# Allegro board CM_PCB_V2_03APR2019.brd
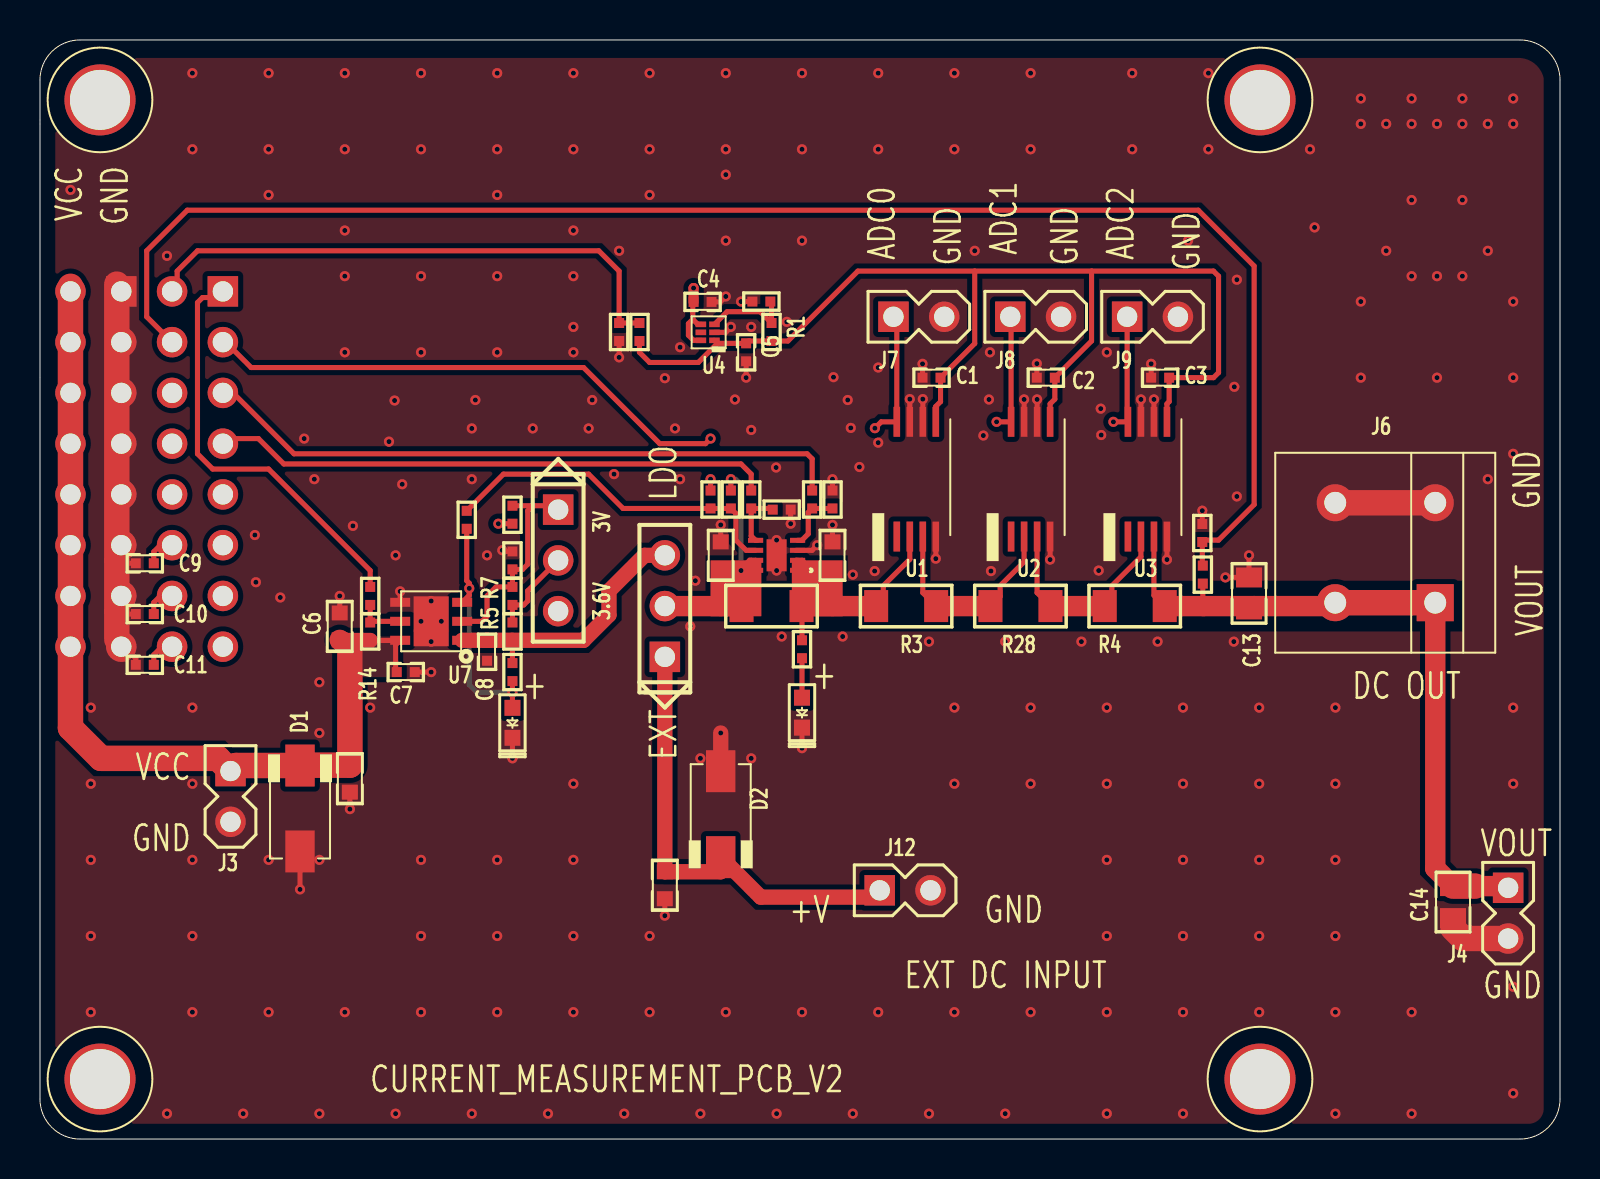
[diagram p0: board, top side]
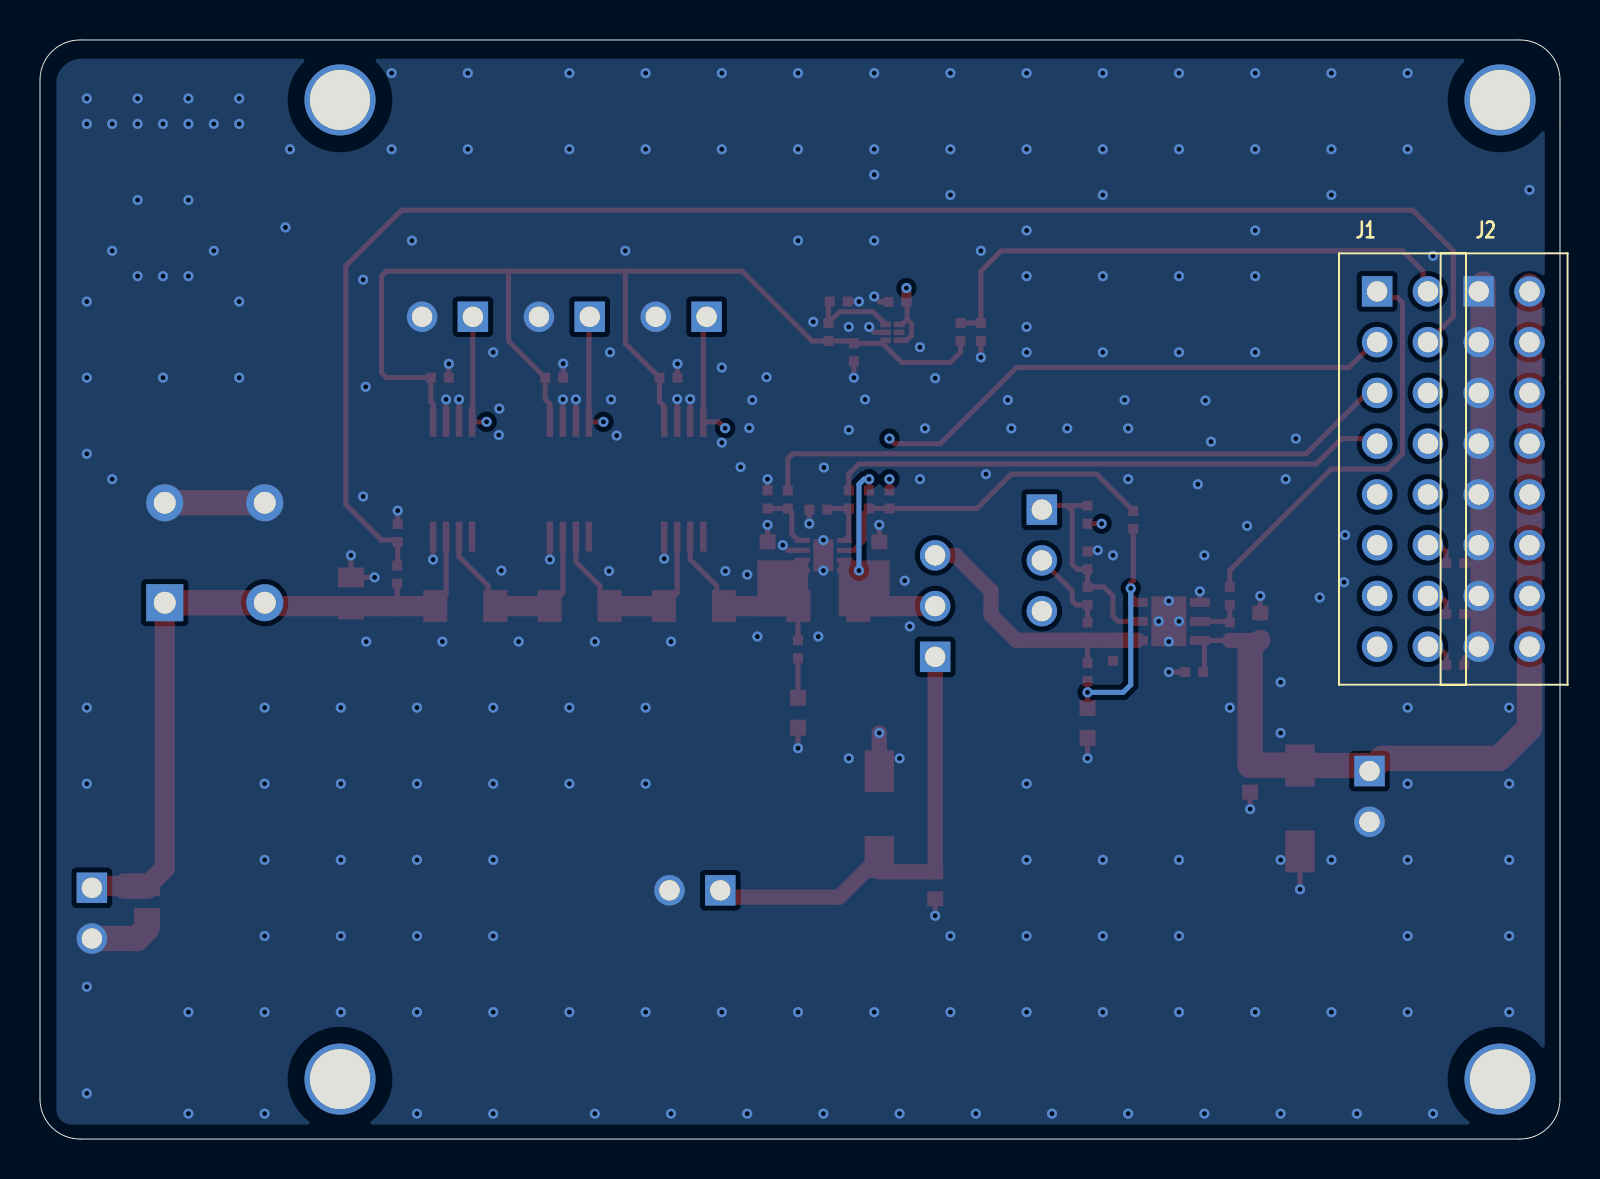
[diagram p1: board, bottom side, seen from below]

Outline 76 x 55 mm; copper layers: TOP, L2_GND, L3_PWR, BOTTOM. Coordinates in mm from the lower left corner of the outline.
Outline path: 0,53 arc(0.59,54.41) 2,55 74,55 arc(75.41,54.41) 76,53 76,2 arc(75.41,0.59) 74,0 2,0 arc(0.59,0.59) 0,2 0,53

## Design rules (mm)
constraint set DEFAULT: min track width 0.127

## Placement (name value [footprint] x y rotation side)
C1  1uF  [C0402]  44.58 38.1 90 top
C2  1uF  [C0402]  50.29 38.1 90 top
C3  1uF  [C0402]  56.01 38.1 90 top
C4  1uF  [C0402]  33.13 41.89 270 top
C5  4.7uF  [C0402]  35.31 39.37 180 top
C6  10uF, 10V  [C0603]  14.99 25.65 180 top
C7  1uF  [C0402]  18.29 23.37 270 top
C8  4.7uF  [C0402]  22.35 24.38 180 top
C9  NL  [C0402]  5.24 28.81 90 top
C10  NL  [C0402]  5.24 26.27 90 top
C11  NL  [C0402]  5.24 23.73 90 top
C12  10uF, 10V  [C0603]  15.49 18.03 0 top
C13  NL  [C0805]  60.45 27.3 180 top
C14  NL  [C0805]  70.65 11.86 0 top
C15  10uF, 10V  [C0603]  31.24 12.7 0 top
C16  10uF, 10V  [C0603]  34.04 29.21 180 top
C17  10uF, 10V  [C0603]  39.62 29.21 180 top
D1  1SMA4746  [SMA4745]  13 16.54 90 top
D2  1SMA4746  [SMA4745]  34.04 16.26 270 top
D12  GREEN 0603  [LED_160804_1]  38.1 21.34 0 top
D17  GREEN 0603  [LED_160804_1]  23.62 20.83 0 top
J1  CON2X8  [HDR2X8]  7.87 33.53 180 bottom
J2  CON2X8  [HDR2X8]  2.79 33.53 180 bottom
J3  HDR1X2  [HDR1X2_100MIL]  9.53 18.41 0 top
J4  HDR1X2  [HDR1X2_100MIL]  73.41 12.57 0 top
J6  TERM_BLK_2_45DEG_PUSH  [2TERMINAL_1862411]  69.76 26.84 180 top
J7  HDR1X2  [HDR1X2_100MIL]  42.67 41.15 90 top
J8  HDR1X2  [HDR1X2_100MIL]  48.51 41.15 90 top
J9  HDR1X2  [HDR1X2_100MIL]  54.36 41.15 90 top
J10  HDR1X3  [HDR1X3_100MIL]  31.24 24.13 180 top
J11  HDR1X3  [HDR1X3_100MIL]  25.91 31.5 0 top
J12  HDR1X2  [HDR1X2_100MIL]  41.99 12.45 90 top
MH1  -  [NPTH3MM]  3 52 0 top
MH2  -  [NPTH3MM]  3 3 0 top
MH3  -  [NPTH3MM]  61 3 0 top
MH4  -  [NPTH3MM]  61 52 0 top
NOREF  -  []  70 0 90 top
NOREF#2  -  []  92.53 -49.75 0 top
NOREF#3  -  []  0 42.12 0 top
R1  464K  [R0402]  36.58 40.39 0 top
R2  100K  [R0402]  36.07 41.91 270 top
R3  1  [R1206]  43.31 26.67 90 top
R4  0.01  [R1206]  54.74 26.67 90 top
R5  280K  [R0402]  23.62 25.4 0 top
R6  100K  [R0402]  23.62 28.96 0 top
R7  121K  [R0402]  23.62 27.18 0 top
R9  301K  [R0402]  29.97 40.39 0 top
R10  100K  [R0402]  58.12 30.33 0 top
R11  301K  [R0402]  58.14 28.24 0 top
R12  100K  [R0402]  28.96 40.39 180 top
R13  4.7K  [R0402]  38.1 24.51 180 top
R14  4.7K  [R0402]  16.51 25.4 180 top
R15  0  [R0402]  16.51 27.18 180 top
R16  NL  [R1206]  36.58 26.67 90 top
R17  4.7K  [R0402]  33.53 32 180 top
R18  100K  [R0402]  34.54 32 0 top
R19  0  [R0402]  35.56 32 180 top
R20  0  [R0402]  38.61 32 0 top
R21  100K  [R0402]  37.08 31.5 90 top
R22  100K  [R0402]  39.62 32 180 top
R27  4.7K  [R0402]  23.62 23.37 180 top
R28  0.1  [R1206]  49.02 26.67 90 top
R29  0  [R0402]  21.34 30.99 0 top
R30  169K  [R0402]  23.62 31.24 0 top
U1  INA240A4PWR  [TSSOP8]  43.81 33.02 90 top
U2  INA240A4PWR  [TSSOP8]  49.53 33.02 90 top
U3  INA240A4PWR  [TSSOP8]  55.37 33.02 90 top
U4  LDK130PU-R  [DFN6_1P2X1P5]  33.38 40.37 180 top
U6  ADP198ACPZ-R7  [CP_8_10]  36.83 29.21 180 top
U7  LDFMPUR  [6-DFN-3X3]  19.56 25.91 180 top

## Library data of the parts
C1-C17 = CAP NP_0
D1 D2 = DIODE ZENER
D12 D17 = LED_0603
J1 J2 = CON2X8
J3 J4 J7-J9 J12 = HDR1X2
J6 = TERM_BLK_2_45DEG_PUSH
J10 J11 = HDR1X3
MH1-MH4 = 4MM_NPTH_0
R1-R7 R9-R22 R27-R30 = RES-H
U1-U3 = INA240AxPW
U4 = LDK130_ADJ
U6 = ADP198ACPZ-R7_0: User Part Number: PN; Tolerance: TOL
U7 = LDFMPUR

## Footprints (pads in the part's own frame, mm; a bottom-side part is the same pattern mirrored in y, then rotated)
2TERMINAL_1862411
  rect 1.854x1.854 hole 1.092: 1(0,0)
  round 1.854 hole 1.092: 2(0,-5) 3(5,-5) 4(5,0)
6-DFN-3X3
  rect 1x0.45 smd: 1(-1.55,0.95) 2(-1.55,0) 3(-1.55,-0.95) 4(1.55,-0.95) 5(1.55,0) 6(1.55,0.95)
  rect 1.75x2.5 smd: 7(0,0)
C0402
  rect 0.5x0.5 smd: 1(0,0.45) 2(0,-0.45)
C0603
  rect 0.8x0.75 smd: 1(0,0.675) 2(0,-0.675)
C0805
  rect 1.3x1 smd: 1(0,0.8) 2(0,-0.8)
CP_8_10
  rect 0.755x0.25 smd: 1(-1.05,0.75) 2(-1.05,0.25) 3(-1.05,-0.25) 4(-1.05,-0.75) 5(1.05,-0.75) 6(1.05,-0.25) 7(1.05,0.25) 8(1.05,0.75)
  rect 1x1.6 smd: 9(0,0)
DFN6_1P2X1P5
  rect 0.53x0.28 smd: 1(-0.34,0.4) 2(-0.34,0) 3(-0.34,-0.4) 4(0.34,-0.4) 5(0.34,0) 6(0.34,0.4)
HDR1X2_100MIL
  rect 1.524x1.524 hole 1.016: 1(0,0)
  round 1.524 hole 1.016: 2(0,-2.54)
HDR1X3_100MIL
  rect 1.524x1.524 hole 1.016: 1(0,0)
  round 1.524 hole 1.016: 2(0,-2.54) 3(0,-5.08)
HDR2X8
  rect 1.524x1.524 hole 1.016: 1(-1.27,8.89)
  round 1.524 hole 1.016: 2(1.27,8.89) 3(-1.27,6.35) 4(1.27,6.35) 5(-1.27,3.81) 6(1.27,3.81) 7(-1.27,1.27) 8(1.27,1.27) 9(-1.27,-1.27) 10(1.27,-1.27) 11(-1.27,-3.81) 12(1.27,-3.81) 13(-1.27,-6.35) 14(1.27,-6.35) 15(-1.27,-8.89) 16(1.27,-8.89)
LED_160804_1
  rect 0.8x0.8 smd: 1(0,0.75) 2(0,-0.75)
NPTH3MM
  round 3.556 hole 3: 1(0,0)
R0402
  rect 0.5x0.5 smd: 1(0,0.45) 2(0,-0.45)
R1206
  rect 1.6x1.2 smd: 1(0,1.5) 2(0,-1.5)
SMA4745
  rect 2.1x1.47 smd: 1(-2.15,0) 2(2.15,0)
TSSOP8
  rect 1.5x0.33 smd: 1(-2.87,0.975) 2(-2.87,0.325) 3(-2.87,-0.325) 4(-2.87,-0.975) 5(2.87,-0.975) 6(2.87,-0.325) 7(2.87,0.325) 8(2.87,0.975)

## Nets
4V5: C1.2 C2.2 C3.2 C5.2 R1.2 R9.2 U1.5(VS) U2.5(VS) U3.5(VS) U4.1(OUT)
4V5_SCALED: J1.2 R9.1 R12.2
GND: C1.1 C2.1 C3.1 C4.1 C5.1 C6.2 C7.1 C8.1 C9.1 C10.1 C11.1 C12.2 C13.2 C14.2 C15.2 C16.2 C17.2 D1.1 D2.1 D12.2(CATHODE) D17.2(CATHODE) J2.1 J2.3 J2.5 J2.7 J2.9 J2.11 J2.13 J2.15 J3.2 J4.2 J6.2 J6.3(2B) J7.2 J8.2 J9.2 J12.2 R2.2 R6.1 R10.1 R12.1 R21.2 R22.2 U1.4 U1.6 U1.7 U2.4 U2.6 U2.7 U3.4 U3.6 U3.7 U4.2 U6.3 U6.9 U7.4 U7.7
VIN: C4.2 C6.1 C7.2 C12.1 D1.2(CATHODE) J2.2 J2.4 J2.6 J2.8 J2.10 J2.12 J2.14 J2.16 J3.1 R14.1 U4.4 U4.6 U7.6
11: J1.11
ADC_IN0: C11.2 J1.16 J7.1 U1.8
ADC_IN1: C10.2 J1.14 J8.1 U2.8
ADC_IN2: C9.2 J1.12 J9.1 U3.8
LDO_PGOOD: D17.1 R27.1 R29.2 U7.3
P22_CNRL: J1.7 R19.2
P23_CNRL: J1.5 R20.1
P24_CNRL: J1.3 R17.2
P25_CNRL: J1.1 R15.2
SW_EN: R17.1 R18.2 R29.1 U6.6
V_EXT: C15.1 D2.2(CATHODE) J10.1 J12.1
VADJ: J11.1 R6.2 R7.1 R30.1 U7.2
VLDO: C8.2 J10.3 R5.2 R27.2 U7.1(VOUT)
VOUT: C13.1 C14.1 J4.1 J6.1 J6.4 R4.2 R11.2 U3.3
VOUT_SCALED: J1.4 R10.2 R11.1
VOUTA: C17.1 R3.1 R13.2 R16.2 U1.2 U6.1 U6.2(VOUT_1)
VOUTB: R3.2 R28.1 U1.3 U2.2
VOUTC: R4.1 R28.2 U2.3 U3.2
VSW: C16.1 J10.2 R16.1 R18.1 U6.7 U6.8
N17460686: R1.1 R2.1 U4.3
N17472971: MH1.1(MH)
N17473001: MH3.1(MH)
N17473004: MH2.1(MH)
N17473007: MH4.1(MH)
N17481014: J11.2 R5.1 R7.2
N17481423: D12.1 R13.1
N17482224: R14.2 R15.1 U7.5
N17485003: R19.1 R21.1 U6.5
N17485029: R20.2 R22.1 U6.4
N17501450: J11.3 R30.2

Pads without a net: J1 6 8 9 10 13 15; U1 1; U2 1; U3 1; U4 5

## Via types
v1: diameter 0.508, hole 0.254, TOP to BOTTOM, 265 vias

## Routing (per net, layer and track width the routed paths; a pad name or vN(x,y) marks a point on that pad's centre or on a via; arc(x,y) is an arc through that point)
4V5: length 58.4
  TOP w0.254: 33.87,39.82 C5.2 35.42,39.94 R1.2 37.4,39.94 40.89,43.43 46.74,43.43 ; 33.87,39.82 U4.1 ; 33.87,39.82 32.91,38.86 30.48,38.86 29.97,39.37 R9.2 ; 52.58,43.43 46.74,43.43 ; 52.58,43.43 58.67,43.43 58.93,43.18 58.93,38.35 58.67,38.1 C3.2 56.46,36.9 56.35,36.79 U3.5 ; 52.58,43.43 52.58,39.94 C2.2 50.74,37.03 50.51,36.79 U2.5 ; 46.74,43.43 46.74,39.81 C1.2 45.03,36.9 44.79,36.66 U1.5
4V5_SCALED: length 27.7
  TOP w0.254: J1.2 6.6,42.67 6.86,42.93 6.86,43.43 7.87,44.45 27.94,44.45 28.96,43.43 R12.2 R9.1
GND: length 68.7
  TOP w0.254: D12.2 v1(38.1,19.56) ; D17.2 v1(23.62,19.05) ; v1(38.86,29.72) 38.6,29.46 37.81,29.46 ; R2.2 v1(35.05,41.91) ; v1(23.11,29.46) 23.17,29.41 R6.1 ; C9.1 3.99,28.81 3.84,28.96 ; v1(59.27,28.11) C13.2 v1(60.45,29.21) ; C15.2 v1(31.24,11.18) ; C3.1 v1(55.56,38.79) ; U1.4 v1(44.79,29.04) ; C10.1 3.99,26.27 3.84,26.42 ; C14.2 70.65,9.99 ; C7.1 v1(19.56,23.37) ; v1(34.29,42.16) 34.02,41.89 C4.1 ; C1.1 v1(44.13,38.79) ; U2.4 v1(50.51,29) ; U7.7 v1(20.07,25.91) ; U7.7 v1(19.56,24.89) ; U7.7 v1(19.05,25.91) ; U7.7 v1(19.56,26.92) ; v1(36.83,29.97) U6.9 v1(36.83,28.45) ; U3.7 v1(55.05,37.01) ; U1.7 v1(43.49,37.03) ; C16.2 v1(34.04,30.73) ; C12.2 v1(15.49,16.51) ; U2.7 v1(49.2,37.01) ; 3.84,25 4.79,24.06 C11.1 ; R12.1 v1(28.96,39.12) ; U4.2 34.29,40.37 34.54,40.62 v1(34.54,40.64) ; U1.6 v1(44.14,37.03) ; C5.1 v1(35.31,38.1) ; U7.4 v1(18.01,27.41) ; U3.6 v1(55.7,37.01) ; C17.2 v1(39.62,30.73) ; U2.6 v1(49.86,37.01) ; C6.2 v1(14.99,27.18) ; R22.2 v1(39.62,33.02) ; D1.1 v1(13,12.49) ; R10.1 v1(58.12,31.45) ; C2.1 v1(49.84,38.8) ; R21.2 v1(37.53,30.79) ; U3.4 v1(56.35,29)
  TOP w0.762: D2.1 v1(34.04,20.32)
  TOP w1.27: 3.84,42.78 3.84,25 ; 73.41,10.03 71.16,10.03 70.65,10.54 ; J6.3 J6.2
  vias: v1(1.52,47.5) v1(2.54,21.59) v1(2.54,17.78) v1(2.54,13.97) v1(2.54,10.16) v1(2.54,6.35) v1(6.35,44.2) v1(6.35,1.27) v1(7.62,53.34) v1(7.62,49.53) v1(7.62,21.59) v1(7.62,17.78) v1(7.62,13.97) v1(7.62,10.16) v1(7.62,6.35) v1(10.16,1.27) v1(10.74,30.23) v1(10.79,27.86) v1(11.43,53.34) v1(11.43,49.53) v1(11.43,47.24) v1(11.43,13.97) v1(11.43,6.35) v1(12.01,27.1) v1(13.21,35.05) v1(13.72,33.02) v1(13.97,22.86) v1(13.97,20.32) v1(13.97,13.97) v1(13.97,1.27) v1(15.24,53.34) v1(15.24,49.53) v1(15.24,45.47) v1(15.24,43.18) v1(15.24,39.37) v1(15.24,6.35) v1(15.65,30.68) v1(16.51,21.59) v1(17.45,34.9) v1(17.73,36.96) v1(17.78,29.21) v1(17.78,1.27) v1(18.11,32.77) v1(19.05,53.34) v1(19.05,49.53) v1(19.05,43.18) v1(19.05,39.37) v1(19.05,13.97) v1(19.05,10.16) v1(19.05,6.35) v1(21.59,35.56) v1(21.59,33.02) v1(21.59,1.27) v1(21.77,36.98) v1(22.35,29.21) v1(22.86,53.34) v1(22.86,49.53) v1(22.86,47.24) v1(22.86,43.18) v1(22.86,39.37) v1(22.86,13.97) v1(22.86,10.16) v1(22.86,6.35) v1(24.64,35.56) v1(25.4,1.27) v1(26.67,53.34) v1(26.67,49.53) v1(26.67,45.47) v1(26.67,43.18) v1(26.67,40.64) v1(26.67,39.37) v1(26.67,17.78) v1(26.67,13.97) v1(26.67,10.16) v1(26.67,6.35) v1(27.43,35.56) v1(27.61,36.98) v1(28.7,33.27) v1(28.96,44.45) v1(29.21,1.27) v1(30.48,53.34) v1(30.48,49.53) v1(30.48,47.24) v1(30.48,10.16) v1(30.48,6.35) v1(31.24,38.07) v1(31.75,35.56) v1(32,39.62) v1(32,33.02) v1(32.51,25.65) v1(32.77,27.94) v1(33.02,19.05) v1(33.02,1.27) v1(34.29,53.34) v1(34.29,49.53) v1(34.29,48.26) v1(34.29,44.96) v1(34.29,6.35) v1(34.75,37.01) v1(35.56,40.64) v1(35.56,35.48) v1(35.56,19.05) v1(36.8,33.6) v1(36.83,1.27) v1(37.08,25.15) v1(37.34,40.89) v1(38.1,53.34) v1(38.1,49.53) v1(38.1,44.96) v1(38.1,6.35) v1(39.67,38.13) v1(40.13,25.15) v1(40.39,36.98) v1(40.54,35.59) v1(40.64,28.24) v1(40.64,1.27) v1(40.97,33.63) v1(41.73,28.42) v1(41.91,53.34) v1(41.91,49.53) v1(41.91,38.61) v1(41.91,34.85) v1(41.91,6.35) v1(44.45,24.89) v1(44.45,1.27) v1(45.72,53.34) v1(45.72,49.53) v1(45.72,21.59) v1(45.72,17.78) v1(45.72,6.35) v1(46.74,44.45) v1(47.17,35.2) v1(47.45,37.01) v1(47.5,39.37) v1(47.55,28.42) v1(48.26,24.89) v1(48.26,1.27) v1(49.53,53.34) v1(49.53,49.53) v1(49.53,21.59) v1(49.53,17.78) v1(49.53,6.35) v1(52.07,24.89) v1(52.93,28.45) v1(53.04,36.55) v1(53.06,35.23) v1(53.34,39.37) v1(53.34,21.59) v1(53.34,17.78) v1(53.34,13.97) v1(53.34,10.16) v1(53.34,6.35) v1(53.34,1.27) v1(54.61,53.34) v1(54.61,49.53) v1(55.88,24.89) v1(57.15,21.59) v1(57.15,17.78) v1(57.15,13.97) v1(57.15,10.16) v1(57.15,6.35) v1(57.15,1.27) v1(57.4,44.96) v1(58.42,53.34) v1(58.42,49.53) v1(59.72,37.64) v1(59.69,24.89) v1(59.84,43) v1(59.84,32.16) v1(60.96,21.59) v1(60.96,17.78) v1(60.96,13.97) v1(60.96,10.16) v1(60.96,6.35) v1(63.5,49.53) v1(63.73,45.62) v1(64.77,21.59) v1(64.77,17.78) v1(64.77,13.97) v1(64.77,10.16) v1(64.77,6.35) v1(64.77,1.27) v1(66.04,52.07) v1(66.04,50.8) v1(66.04,41.91) v1(66.04,38.1) v1(67.31,50.8) v1(67.31,44.45) v1(68.58,52.07) v1(68.58,50.8) v1(68.58,46.99) v1(68.58,43.18) v1(68.58,6.35) v1(68.58,1.27) v1(69.85,50.8) v1(69.85,43.18) v1(69.85,38.1) v1(71.12,52.07) v1(71.12,50.8) v1(71.12,46.99) v1(71.12,43.18) v1(72.39,50.8) v1(72.39,44.45) v1(72.39,33.02) v1(73.66,52.07) v1(73.66,50.8) v1(73.66,41.91) v1(73.66,38.1) v1(73.66,34.29) v1(73.66,21.59) v1(73.66,17.78) v1(73.66,7.62) v1(73.66,2.29)
VIN: length 89.1
  TOP w0.254: R14.1 18,24.95 ; 18,24.95 U7.6 ; 18,24.95 17.78,24.73 17.78,23.43 C7.2 ; 32.64,41.02 32.89,40.77 U4.4 ; 32.64,41.02 32.42,40.8 32.42,40.22 32.67,39.97 U4.6 ; 32.64,41.02 32.64,41.85 C4.2
  TOP w0.508: C4.2 v1(32.68,42.58)
  TOP w0.762: 15.02,24.95 R14.1
  TOP w1.016: C6.1 15.49,24.47 15.49,24.38
  TOP w1.27: 15.49,24.38 C12.1 13.02,18.71 D1.2 9.8,18.69 J3.1 8.89,19.05 3.05,19.05 1.52,20.57 J2.16 J2.14 J2.12 J2.10 J2.8 J2.6 J2.4 J2.2 1.52,42.67
  L3_PWR w0.508: v1(32.68,42.58) 26.95,48.31 5.41,48.31 1.52,44.42 J2.2
ADC_IN0: length 48.9
  TOP w0.254: J1.16 6.1,24.64 5.69,24.23 C11.2 ; v1(41.74,35.57) 42.06,35.89 U1.8 42.84,40.98 J7.1
  L3_PWR w0.254: v1(41.74,35.57) 40.94,34.77 35.23,34.77 34.26,35.74 32.99,35.74 32.03,34.77 18.8,34.77 9.98,25.96 7.34,25.96 6.6,25.22 J1.16
ADC_IN1: length 53.2
  TOP w0.254: C10.2 5.69,26.85 6.02,27.18 J1.14 ; J8.1 48.55,41.11 U2.8 v1(47.83,35.89)
  L3_PWR w0.254: J1.14 6.6,27.76 7.29,28.45 10.13,28.45 18.03,36.35 42.52,36.35 42.98,35.89 v1(47.83,35.89)
ADC_IN2: length 59
  TOP w0.254: v1(53.67,35.89) U3.8 54.36,35.93 J9.1 ; C9.2 5.69,29.39 6.02,29.72 J1.12
  L3_PWR w0.254: v1(53.67,35.89) 52.63,35.89 52.1,36.42 45.59,36.42 44.45,37.57 17.09,37.57 10.52,30.99 7.29,30.99 6.58,30.28 6.6,30.25 J1.12
LDO_PGOOD: length 12.4
  TOP w0.254: D17.1 v1(23.62,22.35) R27.1 ; U7.3 21.46,27.21 v1(21.46,27.56) 21.46,27.81 21.34,27.94 R29.2
  BOTTOM w0.254: v1(23.62,22.35) 21.84,22.35 21.46,22.73 v1(21.46,27.56)
P22_CNRL: length 28.4
  TOP w0.254: J1.7 9.14,34.94 9.03,35.05 10.92,35.05 12.19,33.78 35.05,33.78 35.56,33.27 R19.2
P23_CNRL: length 32.9
  TOP w0.254: J1.5 9.14,37.48 9.03,37.59 9.4,37.59 12.7,34.29 38.35,34.29 38.61,34.04 R20.1
P24_CNRL: length 29.6
  TOP w0.254: R17.2 v1(33.53,33.02) ; v1(33.53,35.05) 33.27,34.8 30.99,34.8 27.18,38.61 10.56,38.61 9.14,40.02 ; 9.14,40.02 J1.3 ; 9.14,40.02 9.03,40.13
  L2_GND w0.254: v1(33.53,33.02) v1(33.53,35.05)
P25_CNRL: length 21.3
  TOP w0.254: R15.2 16.51,28.45 11.43,33.53 8.64,33.53 7.87,34.29 7.87,41.86 8.13,42.11 8.58,42.11 9.14,42.67 J1.1
SW_EN: length 17.6
  TOP w0.254: U6.6 35.31,29.46 34.8,29.97 34.8,31.3 R18.2 R17.1 29.15,31.55 27.43,33.27 23.17,33.27 R29.1
V_EXT: length 23.2
  TOP w0.762: J10.1 C15.1 34.04,13.37 D2.2 36.04,12.1 41.65,12.1 J12.1
VADJ: length 11.1
  TOP w0.254: U7.2 22.1,25.91 22.35,26.16 22.35,27.18 22.8,27.63 R7.1 R6.2 ; R6.2 24.13,28.51 24.38,28.76 24.38,31.44 24.64,31.69 ; R6.2 23.68,28.45 ; 24.64,31.69 25.71,31.69 J11.1 ; 24.64,31.69 R30.1
VLDO: length 13.9
  TOP w0.254: C8.2 22.35,24.96 ; 23.62,24.96 R5.2 R27.2
  TOP w0.762: J10.3 30.23,29.21 28.45,27.43 28.45,26.23 27.18,24.96 U7.1
VOUT: length 36.3
  TOP w0.254: R11.2 58.14,26.7 58.17,26.67 ; 56.39,26.52 R4.2 55.7,27.21 U3.3 ; 60.71,26.67 60.54,26.5 C13.1
  TOP w1.016: C14.1 69.76,13.55 J6.1 ; 71.75,12.66 73.32,12.66 J4.1 ; R4.2 64.59,26.67 J6.4
  TOP w1.27: J6.1 J6.4 ; C14.1 71.75,12.66
VOUT_SCALED: length 79.1
  TOP w0.254: J1.4 6.6,40.13 6.49,40.13 6.38,40.24 6.24,40.24 5.33,41.15 5.33,44.45 7.37,46.48 57.91,46.48 60.71,43.69 60.71,31.75 58.93,29.97 58.21,29.97 R10.2 58.12,28.72 R11.1
VOUTA: length 14.4
  TOP w0.254: R13.2 38.1,26.65 R16.2 ; U1.2 43.49,29.01 42.16,27.69 42.16,27.03 R3.1 ; 37.81,28.46 U6.1 38.61,28.46 ; 38.61,28.46 38.11,28.96 37.81,28.96 U6.2 ; 38.61,28.46 39.55,28.46 C17.1 39.62,26.67
  TOP w1.016: R16.2 R3.1
VOUTB: length 10.6
  TOP w0.254: R28.1 48.01,27.15 48.01,27.69 49.2,28.88 U2.2 ; R3.2 44.14,27.34 U1.3
  TOP w1.016: R3.2 R28.1
VOUTC: length 10.7
  TOP w0.254: U3.2 55.05,29.14 53.59,27.69 53.59,27.03 R4.1 ; R28.2 49.85,27.34 U2.3
  TOP w1.016: R28.2 R4.1
VSW: length 14.6
  TOP w0.254: U6.8 U6.7 35.48,28.96 34.98,28.46 ; U6.8 35.06,28.46 ; U6.8 35.85,28.46 ; R18.1 v1(34.54,33.02) ; 35.06,28.46 34.98,28.46 ; 35.06,28.46 v1(35.05,28.45) ; 34.98,28.46 34.11,28.46 C16.1 34.04,26.67
  TOP w1.016: R16.1 J10.2
  BOTTOM w0.254: v1(35.05,28.45) 35.05,32.77 34.8,33.02 v1(34.54,33.02)
N17460686: length 4.4
  TOP w0.254: R2.1 36.58,41.85 R1.1 36.01,41.4 34.36,41.4 U4.3
N17481014: length 4.4
  TOP w0.254: R5.1 R7.2 24.19,26.73 24.38,26.92 24.38,27.43 J11.2
N17481423: length 2
  TOP w0.254: R13.1 D12.1
N17482224: length 2.4
  TOP w0.254: R15.1 R14.2 16.57,25.91 U7.5
N17485003: length 2.9
  TOP w0.254: R21.1 36.58,31.55 R19.1 35.56,30.18 U6.5 35.85,29.96
N17485029: length 3
  TOP w0.254: U6.4 38.09,29.96 38.41,30.28 38.41,31.36 R20.2 R22.1
N17501450: length 6.8
  TOP w0.254: R30.2 v1(22.92,30.79)
  L3_PWR w0.254: J11.3 24.41,27.91 24.41,30.2 23.82,30.79 v1(22.92,30.79)

## Copper pours and planes (outline as drawn; the poured copper is in the pictures)
GND on TOP: 74.42,0.76 74.96,0.99 75.18,1.52 75.18,53.09 74.73,53.82 73.91,54.1 1.78,54.1 1.06,53.8 0.76,53.09 0.76,2.03 1.13,1.13 2.03,0.76 ; 6 cut-outs
GND on BOTTOM: 74.42,0.72 74.96,0.94 75.18,1.48 75.18,53.05 74.72,53.78 73.91,54.06 1.77,54.06 1.06,53.76 0.76,53.05 0.76,1.99 1.13,1.09 2.03,0.72
GND on L2_GND: 74.42,0.76 74.96,0.99 75.18,1.52 75.18,53.09 74.73,53.82 73.91,54.1 1.78,54.1 1.06,53.8 0.76,53.09 0.76,2.03 1.13,1.13 2.03,0.76
GND on L3_PWR: 74.42,0.7 74.96,0.92 75.18,1.46 75.18,53.02 74.73,53.75 73.91,54.04 1.78,54.04 1.06,53.74 0.76,53.02 0.76,1.97 1.13,1.07 2.03,0.7 ; 2 cut-outs
VIN on TOP: 14.99,25.15 14.99,23.11 17.78,23.11 17.78,25.15
VOUTA on TOP (solid shape): 40.13,26.16 37.59,26.16 37.59,28.96 40.13,28.96
VSW on TOP (solid shape): 36.07,26.16 33.53,26.16 33.53,28.96 36.07,28.96

## Text on the board
BOTTOM: L4_BOTTOM
Ref Des/Silkscreen Bottom: SILKSCREEN BOTTOM
User.Comments: SOLDER MASK BOTTOM | SOLDER MASK TOP
TOP: L1_TOP
Ref Des/Silkscreen Top: 3V | 3.6V | VCC | GND | +V | CURRENT_MEASUREMENT_PCB_V2 | EXT DC INPUT | DC OUT | VOUT | LDO | EXT | ADC0 | ADC1 | ADC2 | SILKSCREEN TOP
L2_GND: L2_GND
L3_PWR: L3_POWER PLANE
PAGE_OUTLINE: COPPER WEIGHT | FINISHED | 1 OZ | 1/2 OZ | 370HR | 6.0 MIL | 46.0 MIL | LAYER 1 TOP SIDE | LAYER 4 BOTTOM SIDE | LAYER 2 GND PLANE | LAYER 3 PWR PLANE | .1 | .02 | .010 | CAD | REVIEW | ENG MGR | ENG | MGR | MANUF. ENG. | PURCHASING | QUALITY | TEST | N/A | TITLE | SCALE | ECO NUMBER | DO NOT SCALE TO DRAWING | DWG NO. | SHEET | DECIMAL | TOLERANCES | DO NOT SCALE DRAWING | MACH FINISH | ANGULAR | 1/2 | DATE | SIZE | OF | REV | X | XX | XXX | FABRICATION DWG | OVERALL BOARD THICKNESS .062"+/- 5% AFTER FABRICATION | 1. MATERIAL | NOTES (UNLESS OTHERWISE SPECIFIED): | 2. ETCH | 6. SILK SCREEN | 5. SOLDER MASK | 3. IMPEDENCE CONTROL AND LAYER CONSTRUCTION | 4. FINISH | 7. DRILLING | 5.1 | 5.2 | 6.0 | 5.0 | 4.0 | 4.1 | 2.0 | 2.1 | 2.2 | 3.0 | 8. VENDOR OPTIONS/REQUIREMENTS | 9. | 10. | 11. | 7.0 | 7.1 | 7.2 | 8.0 | 8.1 | SOLDER MASK COLOR REQUIRED IS BLUE LPI. | ALL THE VIAS MUST BE PLUGGED AND TENTED WITH MASK SPECIALLY IN THE BGA AREA. | ____________________________________________________________________________ | SILK SCREEN IS WHITE EPOXY NON-CONDUCTIVE INK. | CLIP SILK SCREEN FROM THE SMT PADS. | NO SOLDER MASK IS ALLOWED ON PADS OR IN NON PLATED THRU HOLES | REFER TO DETAIL "B" FOR LAYER CONSTRUCTION AND IMPEDENCE CONTROL. | PLATE THRU WITH COPPER 0.0010 MIN. | SOLDER DIP AND HOT AIR LEVEL WITH A 60/40% TIN/LEAD COATING.0.0001" MIN | 0.0015" MAX. | ISOLA 370HR. SUBSTITUTIONS REQUIRE TRACKNET APPROVAL | COLOR IS VENDOR'S OPTION. | FLAMMABILITY RATING UL94 V-0 | ETCH TOLERANCE ON ALL FOIL FEATURES INCLUDING FINISHED TRACE WIDTH AND SPACING | TOLERANCE IS +/-10% OF THE ORIGINAL ARTWORK/GERBER DESIGN. | ALL HOLE DIAMETERS IN HOLE CHART ARE FINISHED SIZES, IN MILS. | ALL PLATED HOLE TOLERANCES ARE +/-.003 AFTER PLATING. | ALL NON PLATED HOLE TOLERANCES ARE +.003 -.000. | VENDOR HAS TO SUPPLY THE TEST COUPONS WITH THE RELATIVE BOARDS. | VENDOR HAS TO SUPPLY THE CROSS SECTION OF THE BOARD. | ALL VIA IN PAD NEED TO BE FILLED AND PLATED SHUT. | VENDORS MAY MAKE THE FOLLOWING CHANGES WITHOUT CUSTOMER APPROVAL: | ANY OTHER CHANGES NEED WRITTEN APPROVAL. | BOARD FINISH IS GOLD IMMERSION. | - ROTATE THERMALS TO ELIMINATE ISOLATIONS | - REDUCE SIZE OF THERMALS TO ELIMINATE ISOLATIONS | - REDUCE SIZE OF ANTIPADS TO ELIMINATE ISOLATIONS | - ADD TEARDROPS | - REMOVE NON-FUNCTIONAL PADS ON INTERNAL LAYERS | - INCREASE SILKSCREEN WIDTH TO .007 | INITIAL RELEASE | DESCRIPTION | REVISIONS | CUST NAME | APPROVED BY | xxxxxxxx | xxx | 4 LAYER STACKUP | 1:1 | P/N | FABRICATION DRAWING | 0.0 | D
User.5: SILKSCREEN TOP SIDE
User.6: SILKSCREEN BOTTOM SIDE
User.12: FIGURE | FINISHED_SIZE | 10.0 | 40.0 | 43.0 | 118.11 | DRILL CHART: TOP to BOTTOM | ALL UNITS ARE IN MILS | TOLERANCE_DRILL | +0.0/-7.0 | +3.0/-3.0 | PLATED | QTY | 266 | 50 | 4
User.25: SOLDER PASTE TOP
User.26: SOLDER PASTE BOTTOM
User.27: ASSEMBLY DWG. TOP
User.28: ASSEMBLY DWG. BOTTOM
